# Altium PCB PCB.PcbDoc
Units mm, origin at the board's own origin, x right, y up, seen from the top; angles counter-clockwise.
Board outline 100 x 48 mm, 2 copper layers (Top Layer, Bottom Layer); 30 components, 34 nets, 197 pads, 6 vias.
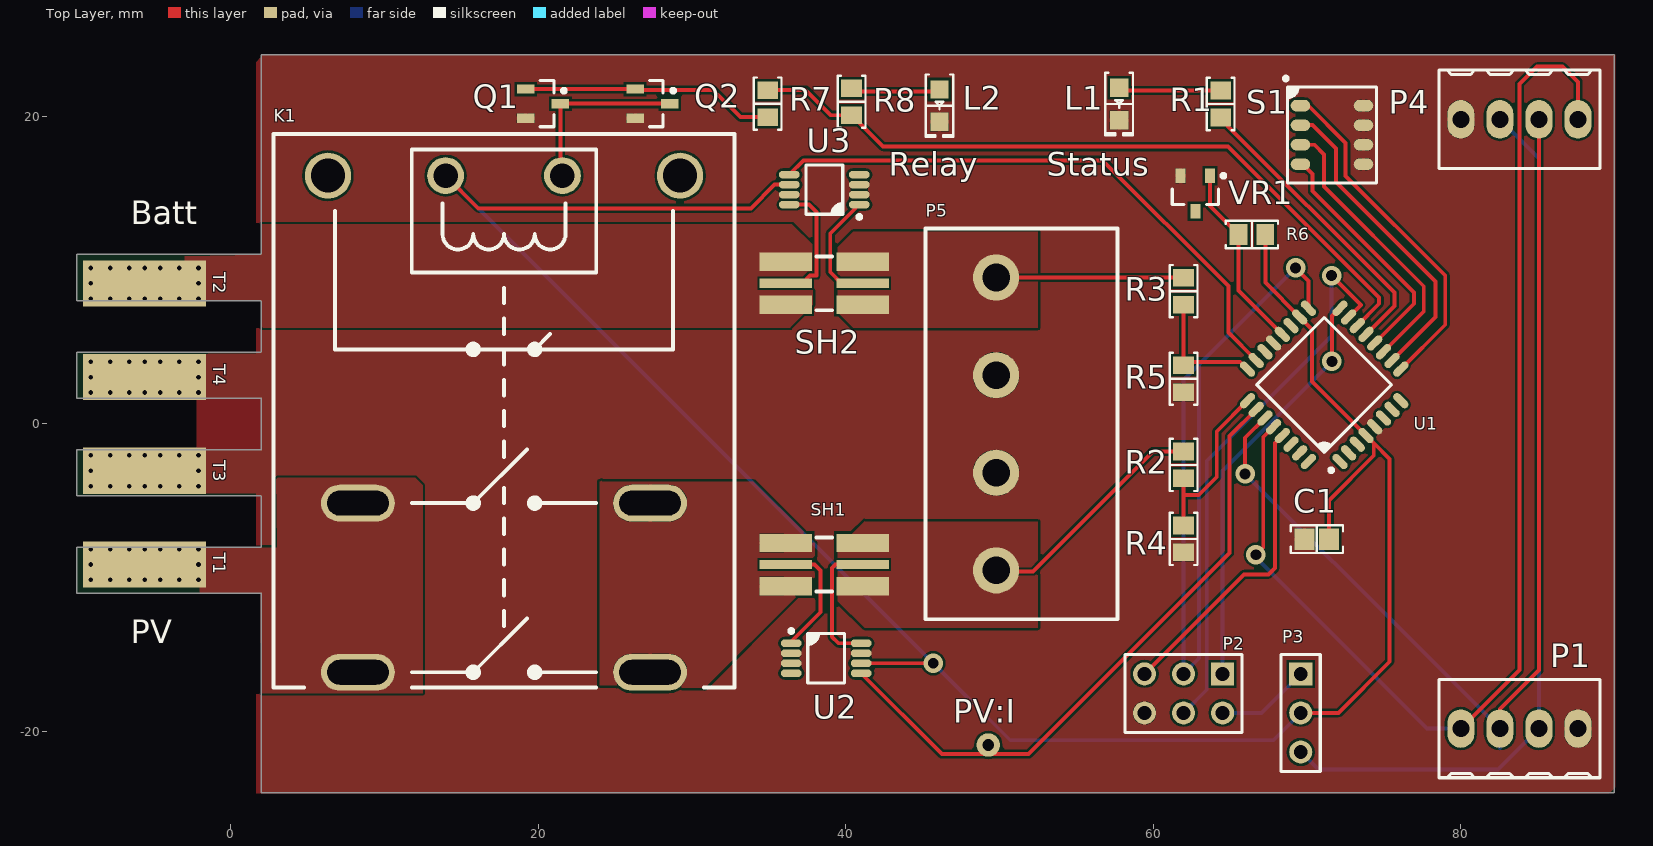
[diagram p0: Top Layer view]
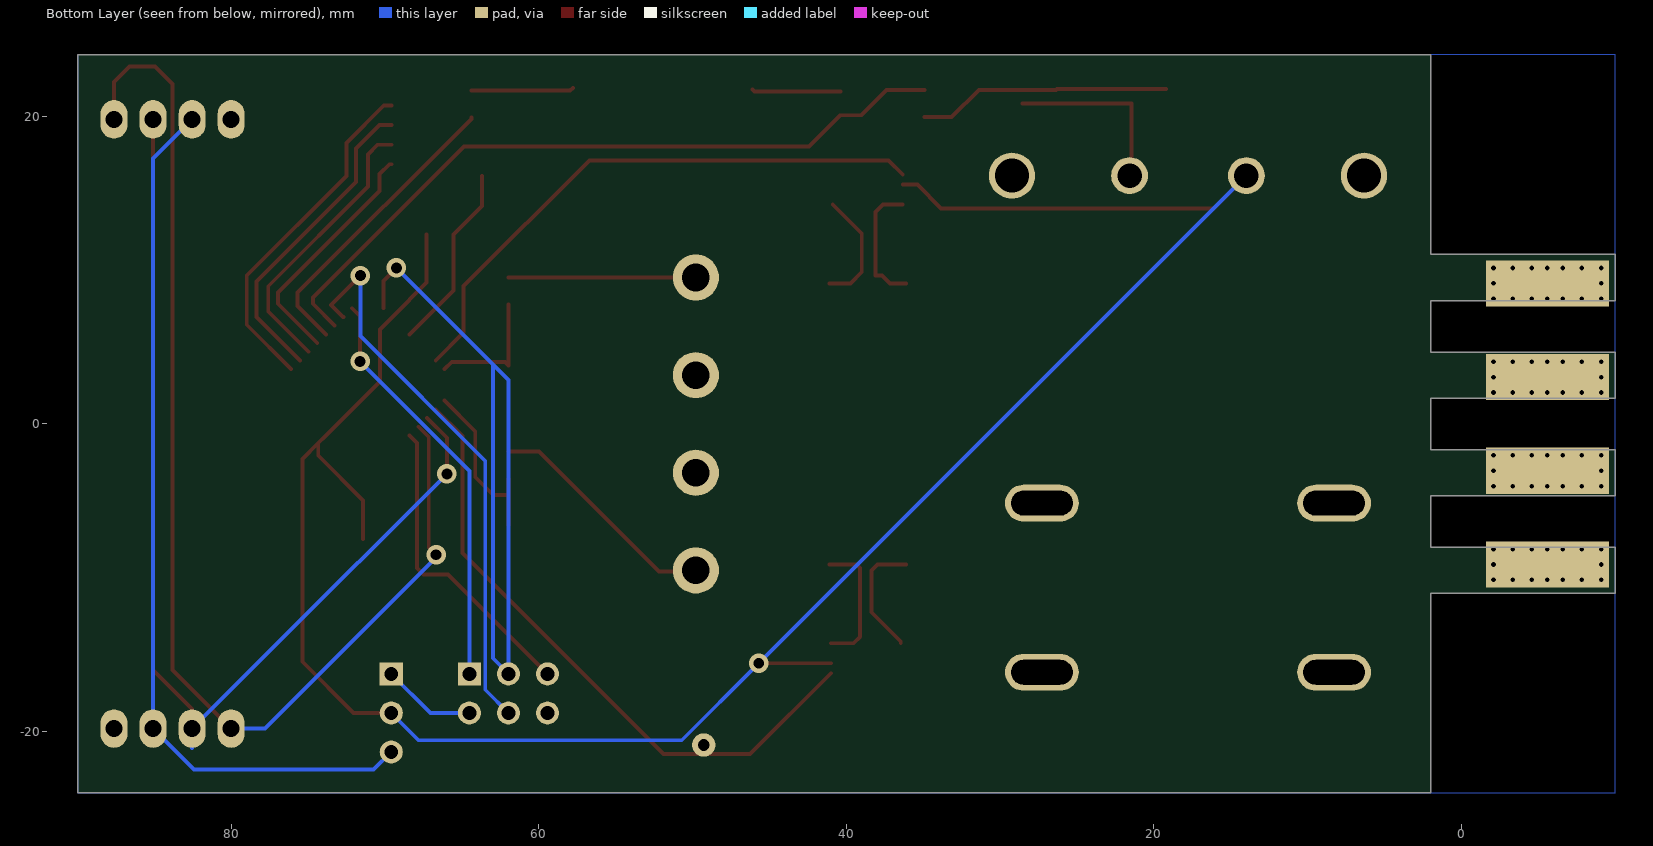
[diagram p1: Bottom Layer view, seen from below]

## Layer stack, top to bottom
Top Solder: solder mask 0.0102, Solder Resist, Dk 3.5
Top Layer: signal copper 0.0356
Dielectric 1: dielectric 0.32, FR-4, Dk 4.8
Bottom Layer: signal copper 0.0356
Bottom Solder: solder mask 0.0102, Solder Resist, Dk 3.5

## Board outline
-10,-11.024 -10,-8.026 2,-8.026 2,-4.674 -10,-4.674 -10,-1.676 2,-1.676 2,1.676 -10,1.676 -10,4.674 2,4.674 2,8 1.974,8.026 -10,8.026 -10,11.024 2,11.024 2,24 90,24 90,-24 2,-24 2,-11.024

## Design rules (kind name [scope] priority, off if disabled: settings)
Clearance [All] p1: gap=0.152 ignorepadtopadclearanceinfootprint=FALSE
PolygonConnect [InNet('PVout') or InNet('PVin') or InNet('Batin') or InNet('Batout')] p1: connectstyle=Direct reliefconductorwidth=0.254 reliefentries=4 polygonreliefangle="90 Angle" airgapwidth=0.254
RoomDefinition Schematic [InComponentClass('Schematic')] p1: confinementstyle=ConfineIn formatcopy=TRUE lockcomponents=FALSE outline -39.9,-62.1 182.9,-62.1 182.9,72.2 -39.9,72.2
RoutingVias [All] p1: holewidth=0.711 width=1.27 viastyle="Through Hole" minholewidth=0.711 minwidth=1.27 maxholewidth=0.711 maxwidth=1.27
SolderMaskExpansion [All] p1: expansion=0.102
Width [All] p1: maxlimit=25.4 minlimit=0.254 preferedwidth=0.254 minimp=50.000000 maximp=50.000000 favimp=50.000000
30 further rules are at their usual default settings.

## Components (designator, comment, footprint, x,y, rotation, side; value= is the part's Value field where it differs from the comment)
C1 "Cap" "CAP 0805/2012" 70.643,-7.493 r0 top value=100nF
K1 "HE-S" "Relay HE-S Parasonic" 17.78,0 r0 top
L1 "LED" "LED 0805/2012 RED" 57.785,20.808 r270 top
L2 "LED" "LED 0805/2012 RED" 46.101,20.701 r270 top
P1 "Header 4" "TE 282834-4" 83.82,-19.812 r180 top
P2 "ICSP" HDR2X3 64.516,-16.256 r180 top
P3 "PWR" HDR1X3 69.596,-16.256 r270 top
P4 "Header 4" "TE 282834-4" 83.82,19.812 r0 top
P5 "Header 4" "4Pin 6.35mm Connector" 49.784,0 r90 top
Q1 "MOSFET-N" SOT23_N 20.32,20.828 r0 top
Q2 "MOSFET-N" SOT23_N 27.432,20.828 r0 top
R1 "Res2" "RES 0805/2012" 64.389,20.808 r270 top value=330
R2 "Res2" "RES 0805/2012" 61.976,-2.667 r90 top value=51K
R3 "Res2" "RES 0805/2012" 61.976,8.636 r90 top value=51K
R4 "Res2" "RES 0805/2012" 61.976,-7.479 r90 top value=1K8
R5 "Res2" "RES 0805/2012" 61.976,2.939 r90 top value=1K8
R6 "Res2" "RES 0805/2012" 66.421,12.319 r0 top value=1K3
R7 "Res2" "RES 0805/2012" 34.925,20.828 r90 top value=330
R8 "Res2" "RES 0805/2012" 40.386,20.955 r270 top value=330
S1 "SW-DIP4" "CTS 218-4LPJ" 71.628,18.796 r0 top
SH1 "Kevin Resistor" "TE TLR Shunt" 38.608,-9.144 r0 top
SH2 "Kevin Resistor" "TE TLR Shunt" 38.608,9.144 r180 top
T1 "PV" PCB_Pin_Outsteeksel -5.588,-9.144 r180 top
T2 "Bat" PCB_Pin_Outsteeksel -5.588,9.144 r180 top
T3 "GND" PCB_Pin_Outsteeksel -5.588,-3.048 r180 top
T4 "GND" PCB_Pin_Outsteeksel -5.588,3.048 r180 top
U1 "Atmega328P" "ST LQFP-32 7X7MM" 71.12,2.54 r135 top
U2 "AD8418" "ANALOG MSOP-8 RM-8" 38.735,-15.24 r0 top
U3 "AD8418" "ANALOG MSOP-8 RM-8" 38.608,15.24 r180 top
VR1 "ZR40401F41" "DIODES SOT-23-3" 62.738,14.986 r270 top

## Footprints (in the part's own frame and the unit in brackets; to place one, negate y for a bottom-side part, rotate by r counter-clockwise, add the part's x,y. Pads: shape width x height; smd on the part's side, far side on the other; paste and mask are expansions set on the pad)
"4Pin 6.35mm Connector" [mm]
  round 3 hole 1.8 paste+0: 1(-9.525,0) 2(-3.175,0) 3(3.175,0) 4(9.525,0)
  silkscreen extent -12.7,-7.9 12.7,4.6, body extent -13.27,-8 12.7,4.5, height 21.5
"ANALOG MSOP-8 RM-8" [mm]
  oval 1.35x0.5 smd: 1(-2.275,0.975) 2(-2.275,0.325) 3(-2.275,-0.325) 4(-2.275,-0.975) 5(2.275,-0.975) 6(2.275,-0.325) 7(2.275,0.325) 8(2.275,0.975)
  silkscreen extent -2.4,-1.6 1.2,1.9, body extent -2.46,-1.5 2.46,1.5, height 1.1
"CAP 0805/2012" [mm] "Chip Capacitor, 2-Leads, Body 2.00x1.20mm, IPC Medium Density"
  rect 1.3x1.4 smd: 1(-0.8,0) 2(0.8,0)
  silkscreen extent -1.7,-0.9 1.7,0.9, body extent -1,-0.64 1,0.64, height 1.26
"CTS 218-4LPJ" [mm] "DIP, 6 POS, Body 8.79x6.05mm, Pitch 1.27mm, IPC Medium Density"
  oval 1.27x0.76 smd: 1(-2.05,1.905) 2(-2.05,0.635) 3(-2.05,-0.635) 4(-2.05,-1.905) 5(2.05,-1.905) 6(2.05,-0.635) 7(2.05,0.635) 8(2.05,1.905)
  silkscreen extent -3.12,-3.12 2.9,3.79, body extent -3.15,-3.13 3.15,3.12, height 2.71
"DIODES SOT-23-3" [mm] "SOT23, 3-Leads, Body 2.90x2.40mm, Pitch 0.95mm, IPC Medium Density"
  rect 0.95x0.65 smd: 1(-1.15,0.95) 2(1.15,0) 3(-1.15,-0.95)
  silkscreen extent -1.27,-1.5 0.7,1.95, body extent -1.41,-1.45 1.41,1.45, height 1.5
HDR1X3 [mm] "Connector; Header; 3 Position"
  rect 1.5x1.5 hole 0.9: 1(0,0)
  round 1.5 hole 0.9: 2(2.54,0) 3(5.08,0)
  silkscreen extent -1.27,-1.27 6.35,1.27
HDR2X3 [mm] "Connector; Header; 3x2 Position"
  rect 1.5x1.5 hole 0.9: 1(0,0)
  round 1.5 hole 0.9: 2(0,2.54) 3(2.54,0) 4(2.54,2.54) 5(5.08,0) 6(5.08,2.54)
  silkscreen extent -1.27,-1.27 6.35,3.81
"LED 0805/2012 RED" [mm] "Chip Diode, 2-Leads, Body 2.00x1.25mm, IPC Medium Density"
  rect 1.2x1.2 smd: 1(-1.05,0) 2(1.05,0)
  silkscreen extent -2.03,-0.9 2.03,0.9, body extent -1,-0.62 1,0.63, height 0.9
PCB_Pin_Outsteeksel [mm]
  rect 8x3 all layers, no hole: 1(0,0)
  round 0.6 hole 0.3: ""(-3.5,-1) ""(-3.5,0) ""(-3.5,1) ""(-2.25,-1) ""(-2.25,1) ""(-1,1) ""(-1,-1) ""(0,1) ""(0,-1) ""(1,1) ""(1,-1) ""(2.25,-1) ""(2.25,1) ""(3.5,-1) ""(3.5,0) ""(3.5,1)
"Relay HE-S Parasonic" [mm]
  oval 4.8x2.4 hole 1.6 slot 4 at 0 deg: 1(-9.5,-16.15) 2(-9.5,-5.15) 7(9.5,-5.15) 8(9.5,-16.15)
  round 3 hole 2.2: 3(-11.45,16.15) 6(11.45,16.15)
  round 2.4 hole 1.6: 4(-3.8,16.15) 5(3.8,16.15)
  silkscreen extent -15,-17.15 15,18.85, body extent -15,-17.15 15,18.85, height 40
"RES 0805/2012" [mm] "Chip Resistor, 2-Leads, Body 2.00x1.25mm, IPC Medium Density"
  rect 1.15x1.35 smd: 1(-0.875,0) 2(0.875,0)
  silkscreen extent -1.7,-0.9 1.7,0.9, body extent -0.95,-0.62 1.05,0.63, height 0.6
SOT23_N [mm] "SOT23, 3-Leads, Body 2.9x1.3mm, Pitch 0.95mm, Lead Span 2.3mm - Reverse Pinning, IPC Medium Density"
  rect 1.15x0.6 smd: 1(1.125,0) 2(-1.125,-0.95) 3(-1.125,0.95)
  silkscreen extent -0.2,-1.5 1.48,1.5, body extent -0.7,-1.5 0.7,1.5, height 1.1
"ST LQFP-32 7X7MM" [mm] "LQFP, 32-Leads, Body 7.00x7.00mm, Pitch 0.80mm, IPC Medium Density"
  oval 1.2x0.5 smd: 1(-4.25,2.8) 2(-4.25,2) 3(-4.25,1.2) 4(-4.25,0.4) 5(-4.25,-0.4) 6(-4.25,-1.2) 7(-4.25,-2) 8(-4.25,-2.8) 17(4.25,-2.8) 18(4.25,-2) 19(4.25,-1.2) 20(4.25,-0.4) 21(4.25,0.4) 22(4.25,1.2) 23(4.25,2) 24(4.25,2.8)
  oval 0.5x1.2 smd: 9(-2.8,-4.25) 10(-2,-4.25) 11(-1.2,-4.25) 12(-0.4,-4.25) 13(0.4,-4.25) 14(1.2,-4.25) 15(2,-4.25) 16(2.8,-4.25) 25(2.8,4.25) 26(2,4.25) 27(1.2,4.25) 28(0.4,4.25) 29(-0.4,4.25) 30(-1.2,4.25) 31(-2,4.25) 32(-2.8,4.25)
  silkscreen extent -4.37,-3.1 3.1,3.72, body extent -4.51,-4.51 4.51,4.51, height 1.55
"TE 282834-4" [mm]
  oval 1.75x2.5 hole 1.1: 1(-3.81,0) 2(-1.27,0) 3(1.27,0) 4(3.81,0)
  silkscreen extent -5.24,-3.2 5.24,3.2, body extent -5.31,-3.25 5.31,3.25, height 10
"TE TLR Shunt" [mm]
  rect 3.4x1.2 smd: 1(-2.5,-1.4) 1(-2.5,1.4) 3(2.5,-1.4) 3(2.5,1.4)
  rect 3.4x0.6 smd: 2(-2.5,0) 4(2.5,0)
  silkscreen extent -0.5,-1.75 0.5,1.75, body extent -3.2,-1.65 3.2,1.65, height 0.65

## Part data
C1: "Capacitor", LatestRevisionDate=17-Jul-2002, LatestRevisionNote="Re-released for DXP Platform.", PackageDescription="Radial Cap, Thru-Hole; 2 Leads; 0.3 in Pin Spacing", PackageReference=RAD-0.3, Published=8-Jun-2000, Publisher="Altium Limited"
K1: library part Relay-DPST, "Dual-Pole Single-Throw Relay", LatestRevisionDate=17-Jul-2002, LatestRevisionNote="Re-released for DXP Platform.", PackageReference=MODULE6, Published=24-Mar-1999, Publisher="Altium Limited"
L1 L2: library part LED0, "Typical INFRARED GaAs LED", LatestRevisionDate=08-Jul-2005, LatestRevisionNote="Mech Layer 1 removed.", PackageDescription="LED; 2 Leads", PackageReference=LED-0, Published=8-Jun-2000, Publisher="Altium Limited"
P1 P4 P5: "Header, 4-Pin", LatestRevisionDate=17-Jul-2002, LatestRevisionNote="Re-released for DXP Platform.", Publisher="Altium Limited"
P2: library part "Header 3X2", "Header, 3-Pin, Dual row", LatestRevisionDate=17-Jul-2002, LatestRevisionNote="Re-released for DXP Platform.", Publisher="Altium Limited"
P3: library part "Header 3", "Header, 3-Pin", LatestRevisionDate=17-Jul-2002, LatestRevisionNote="Re-released for DXP Platform.", Publisher="Altium Limited"
Q1 Q2: "N-Channel MOSFET", LatestRevisionDate=17-Jul-2002, LatestRevisionNote="Re-released for DXP Platform.", PackageDescription="TO, Flat Index; 3 In-Line, Axial Leads; Body Dia. 4.6mm; Lead Dia. 0.5 mm (max)", PackageReference=E3, PackageVersion=1995/1996, Published=8-Jun-2000, Publisher="Altium Limited"
R1 R2 R3 R4 R5 R6 R7 R8: "Resistor", LatestRevisionDate=17-Jul-2002, LatestRevisionNote="Re-released for DXP Platform.", PackageDescription="Axial Device, Thru-Hole; 2 Leads; 0.4 in Pin Spacing", PackageReference=AXIAL-0.4, Published=8-Jun-2000, Publisher="Altium Limited"
S1: "DIP Switch", LatestRevisionDate=17-Jul-2002, LatestRevisionNote="Re-released for DXP Platform.", PackageReference=DIP-8, Published=24-Mar-1999, Publisher="Altium Limited"
T1 T2 T3 T4: library part Socket, "Socket", LatestRevisionDate=17-Jul-2002, LatestRevisionNote="Re-released for DXP Platform.", Publisher="Altium Limited"
VR1: library part "Diode 10TQ035", "Schottky Rectifier", ComponentLink1Description="Manufacturer Link", ComponentLink1URL=http://www.irf.com/, ComponentLink2Description=Datasheet, ComponentLink2URL=http://www.irf.com/product-info/datasheets/data/10tq.pdf, DatasheetVersion=PD-2.057B, LatestRevisionDate=17-Jul-2002, LatestRevisionNote="Re-released for DXP Platform.", Note="Terminal 2 is the TAB and is electrically connected to the cathode", PackageDescription="TO, Thru-Hole, Vertical, Heatsink Mounted; 3 In-Line Leads (1 Absent); Pitch 2.54 mm", PackageReference=TO-220AC, PackageVersion=Feb-1998, Published=8-Jun-2000, Publisher="Altium Limited"

## Free pads (board coordinates)
  round 1.524 hole 0.762: 3(49.276,-20.881)

## Via types
v1: diameter 1.27, hole 0.711, Top Layer to Bottom Layer, 6 vias

## Nets (pads, with @x,y where several pads share a name; then routed paths per layer and width w, separated by ;. In a path a pad name is that pad's centre, name@x,y a point inside that pad or via, vN(x,y) a via of type N, cw(c..) or ccw(c..) an arc to the next point about the centre after c; other vN are vias at no path point)
Batin: SH2.3 T2.1
Batout: P5.4 R3.2 SH2.1 | length 12.2
  Top Layer w0.254: P5.4 61.962,9.525 R3.2
EX: P1.2 P3.3 P4.2 | length 57.7
  Bottom Layer w0.254: P3.3 70.739,-22.479 82.423,-22.479 P1.2 85.09,17.272 P4.2
GND: C1.1 L1.2 L2.2 P1.1 P2.6 P4.1 P5.2 P5.3 Q1.2 Q2.2 R4.1 R5.1 S1.5 S1.6 S1.7 S1.8 T3.1 T4.1 U1.5 U1.21 U2.2 U2.3 U2.7 U3.2 U3.3 U3.7 VR1.3
ICSP_MISO: P2.1 U1.16 | length 27.3
  Top Layer w0.254: v1(71.628,4.064) 71.628,7.008 U1.16
  Bottom Layer w0.254: P2.1 64.516,-3.048 v1(71.628,4.064) v1@71.628,4.445
ICSP_MOSI: P2.4 U1.15 | length 36.3
  Top Layer w0.254: v1(71.61,9.652) 73.524,7.738 72.745,6.959 U1.15
  Bottom Layer w0.254: P2.4 63.487,-17.285 63.487,-2.403 71.61,5.72 v1(71.61,9.652)
ICSP_PWR: P2.2 P3.1 | length 9.7
  Bottom Layer w0.254: P2.2 67.056,-18.796 ; 67.056,-18.796 P3.1 67.056,-18.796
ICSP_RESET: P2.5 U1.29 | length 20.2
  Top Layer w0.254: P2.5 65.913,-9.779 67.51,-9.779 67.917,-9.373 67.917,-1.229 U1.29
ICSP_SCK: P2.3 U1.17 | length 52.9
  Top Layer w0.254: v1(69.257,10.144) 70.095,9.307 U1.17
  Bottom Layer w0.254: v1(69.257,10.144) 62.992,3.879 ; 62.992,3.879 61.976,2.863 P2.3 62.992,-15.24 62.992,3.879
ISensBat: U1.23 U3.5 | length 37.9
  Top Layer w0.254: U3.5 37.263,17.145 56.716,17.145 64.897,8.964 64.897,5.935 U1.23
ISensPV: pad.3 U1.26 U2.5 | length 41.6
  Top Layer w0.254: U2.5 46.258,-21.463 51.89,-21.463 64.971,-8.382 64.971,-0.78 U1.26
NetK1_2: K1.7 K1.8 SH1.1
NetK1_6: K1.5 Q1.1 Q2.1 | length 11.8
  Top Layer w0.254: K1.5 21.445,16.285 Q1.1 Q2.1
NetL1_1: L1.1 R1.1 | length 6.7
  Top Layer w0.254: L1.1 57.96,21.683 R1.1
NetL2_1: L2.1 R8.1 | length 5.8
  Top Layer w0.254: R8.1@40.386,21.623 45.973,21.623 L2.1
NetQ1_3: Q1.3 Q2.3 R7.1 | length 16.5
  Top Layer w0.254: Q1.3 Q2.3 26.368,21.717 31.383,21.717 33.147,19.953 R7.1
NetR1_2: R1.2 U1.13 | length 19.6
  Top Layer w0.254: R1.2 64.389,19.84 75.692,8.537 75.692,7.678 U1.13
NetS1_1: S1.1 U1.9 | length 22.5
  Top Layer w0.254: S1.1 70.086,20.701 72.517,18.27 72.517,16.129 78.994,9.652 78.994,6.454 U1.9
NetS1_2: S1.2 U1.10 | length 20.6
  Top Layer w0.254: S1.2 70.358,19.431 71.882,17.907 71.882,15.748 78.359,9.271 78.359,6.951 U1.10
NetS1_3: S1.3 U1.11 | length 18.4
  Top Layer w0.254: S1.3 70.485,18.161 71.12,17.526 71.12,15.433 77.597,8.956 77.597,7.32 U1.11
NetS1_4: S1.4 U1.12 | length 15.8
  Top Layer w0.254: S1.4 69.723,16.891 70.358,16.256 70.358,15.149 76.962,8.545 76.962,7.816 U1.12
NetSH1_2: SH1.2 U2.1 | length 7.9
  Top Layer w0.254: SH1.2 37.973,-9.144 38.354,-9.525 38.354,-12.244 36.46,-14.138 U2.1
NetSH1_4: SH1.4 U2.8 | length 8.6
  Top Layer w0.254: U2.8 39.538,-14.265 39.116,-13.843 39.116,-9.373 39.345,-9.144 SH1.4
NetSH2_2: SH2.2 U3.1 | length 7.6
  Top Layer w0.254: U3.1 39,12.382 39,9.875 39.731,9.144 SH2.2
NetSH2_4: SH2.4 U3.8 | length 8.3
  Top Layer w0.254: SH2.4 37.16,9.144 37.668,9.652 38.1,9.652 38.1,13.792 37.627,14.265 U3.8
PVin: P5.1 R2.2 SH1.3 | length 15.8
  Top Layer w0.254: P5.1@50.024,-9.285 P5.1 49.855,-9.596 52.175,-9.596 59.979,-1.792 R2.2
PVout: K1.1 K1.2 T1.1
Relay: R7.2 R8.2 U1.14 | length 47.8
  Top Layer w0.254: R7.2@34.925,21.717 37.385,21.717 39.022,20.08 R8.2 42.432,18.034 64.877,18.034 74.699,8.211 74.699,7.816 U1.14
SCL: P1.4 P4.4 U1.28 | length 77.5
  Top Layer w0.254: v1(66.675,-8.509) 67.16,-8.024 67.16,-0.854 U1.28 ; P1.4 83.82,-16.002 83.82,22.098 84.963,23.241 86.629,23.241 87.63,22.24 P4.4
  Bottom Layer w0.254: v1@66.594,-8.59 77.816,-19.812 P1.4
SDA: P1.3 P4.3 U1.27 | length 69.5
  Top Layer w0.254: v1(65.984,-3.246) 65.984,-0.898 U1.27 ; P1.3 82.55,-18.542 85.09,-16.002 P4.3
  Bottom Layer w0.254: v1(65.984,-3.246) 77.47,-14.732 P1.3 82.55,-21.082
VCC: C1.2 K1.4 P3.2 R6.2 U1.4 U1.18 U2.6 U3.6 | length 193.4
  Top Layer w0.254: K1.4 16.105,14.025 33.835,14.025 35.375,15.565 U3.6 ; U2.6 v1(45.695,-15.565) ; R6.2 67.296,9.192 U1.18 70.335,6.154 70.335,2.76 U1.4 74.346,-1.251 ; P3.2 72.049,-18.796 75.378,-15.467 75.378,-2.284 74.346,-1.251 ; C1.2 71.443,-4.967 74.346,-2.064 74.346,-1.251
  Bottom Layer w0.254: v1@45.791,-15.565 v1@45.847,-15.621 ; v1@45.743,-15.613 v1(45.695,-15.565) K1.4 v1@45.743,-15.613 ; v1@45.743,-15.613 45.799,-15.669 50.704,-20.574 67.818,-20.574 ; 67.818,-20.574 P3.2 67.818,-20.574
Vref: R6.1 U1.20 VR1.1 | length 12.3
  Top Layer w0.254: VR1.1 63.688,14.177 R6.1 65.546,8.68 U1.20
VSensBat: R3.1 R5.2 U1.24 | length 8.4
  Top Layer w0.254: R3.1 R5.2 62.201,4.038 65.662,4.038 U1.24
VSensPV: R2.1 R4.2 U1.25 | length 11.5
  Top Layer w0.254: R4.2 61.976,-4.627 ; R2.1 61.976,-4.627 ; U1.25 64.135,-0.485 64.135,-3.456 62.965,-4.627 61.976,-4.627
pads on no net: K1.3 K1.6 T1. T2. T3. T4. U1.1 U1.2 U1.3 U1.6 U1.7 U1.8 U1.19 U1.22 U1.30 U1.31 U1.32 U2.4 U3.4 VR1.2

## Polygon pours and split planes (outlines as drawn)
GND on Bottom Layer "NONET_L02_P000" (solid, shelved, pour order 0): -10,24 90,24 90,-24 -10,-24
GND on Top Layer "Top Layer-GND" (solid, pour order 18): 2,23.876 1.651,23.527 1.651,-24.003 89.662,-24.003 90.043,-23.622 90.043,24.003 1.905,24.003 1.651,23.749 1.651,23.781 2,24.13
GND on Top Layer "Top Layer-GND 1" (solid, pour order 16): -2,4.572 -2.219,4.353 -2.219,-4.5 1.961,-4.5 2.125,-4.336 2.125,-2.54 36.143,-2.54 38.175,-4.572 52.5,-4.572 52.5,4.365 52.707,4.572
Batin on Top Layer "Top Layer-Batin" (solid, pour order 12): -3,10.9 -3,8.075 -1.71,8.075 2,8.075 2,6.125 2.125,6.25 36.4,6.25 36.4,6.277 37.873,7.75 37.873,11.627 36.5,13 2,13 2,11.039 1.961,11
Batout on Top Layer "Top Layer-Batout" (solid, pour order 10): 39.5,11.5 40.5,12.5 52.5,12.5 52.5,6.25 40.5,6.25 39.5,7.25
no net on Top Layer "Top Layer-No Net" (solid, pour order 14): 24,5.5
PVin on Top Layer "Top Layer-PVin" (solid, pour order 8): 52.5,-6.36 52.5,-13.25 41.225,-13.25 39.5,-11.525 39.5,-7.5 40.069,-7.5 41.25,-6.319
NetK1_2 on Top Layer "Top Layer-NetK1_2" (solid, pour order 6): 24,-17 24,-3.59 24.16,-3.75 34,-3.75 38,-7.75 38,-10 30.811,-17.189
no net on Top Layer "Top Layer-No Net 1" (solid, pour order 4): -1.75,-8.75
PVout on Top Layer "Top Layer-PVout" (solid, pour order 2): -2,-8.026 -2,-11.024 1.974,-11.05 2,-17.5 12.5,-17.5 12.5,-4 12,-3.5 4.75,-3.5 2.979,-3.5 3,-5.5 3.026,-8.026 1.961,-8.065

## Silkscreen, mask and mechanical layers (free items; w line width, h text height)
Top Overlay:
  text "Relay" at 42.799,16.15 h1.52
  text "Status" at 53.086,16.15 h1.52
  text "Batt" at -6.5,13 h1.52
  text "PV" at -6.5,-14.25 h1.52
  text "PV:I" at 46.99,-19.431 h1.52
Mechanical 1:
  lines w0.254: -10,-11.024 2,-11.024 2,-24 90,-24 90,0 90,24 2,24 2,11.024 -10,11.024 -10,8.026 1.974,8.026 2,8 2,4.674 -10,4.674 -10,1.676 2,1.676 2,-1.676 -10,-1.676 -10,-4.674 2,-4.674 2,-6.25 2,-8.026 -10,-8.026 -10,-11.024